# Altium PCB Jacks_old.PcbDoc
Units mil, origin at the board's own origin, x right, y up, seen from the top; angles counter-clockwise.
Board outline 1299.21 x 1653.83 mil, 2 copper layers (Top Layer, Bottom Layer); 3 components, 5 nets, 26 pads, 0 vias.
Unrouted connection lines stored in the file: 1.
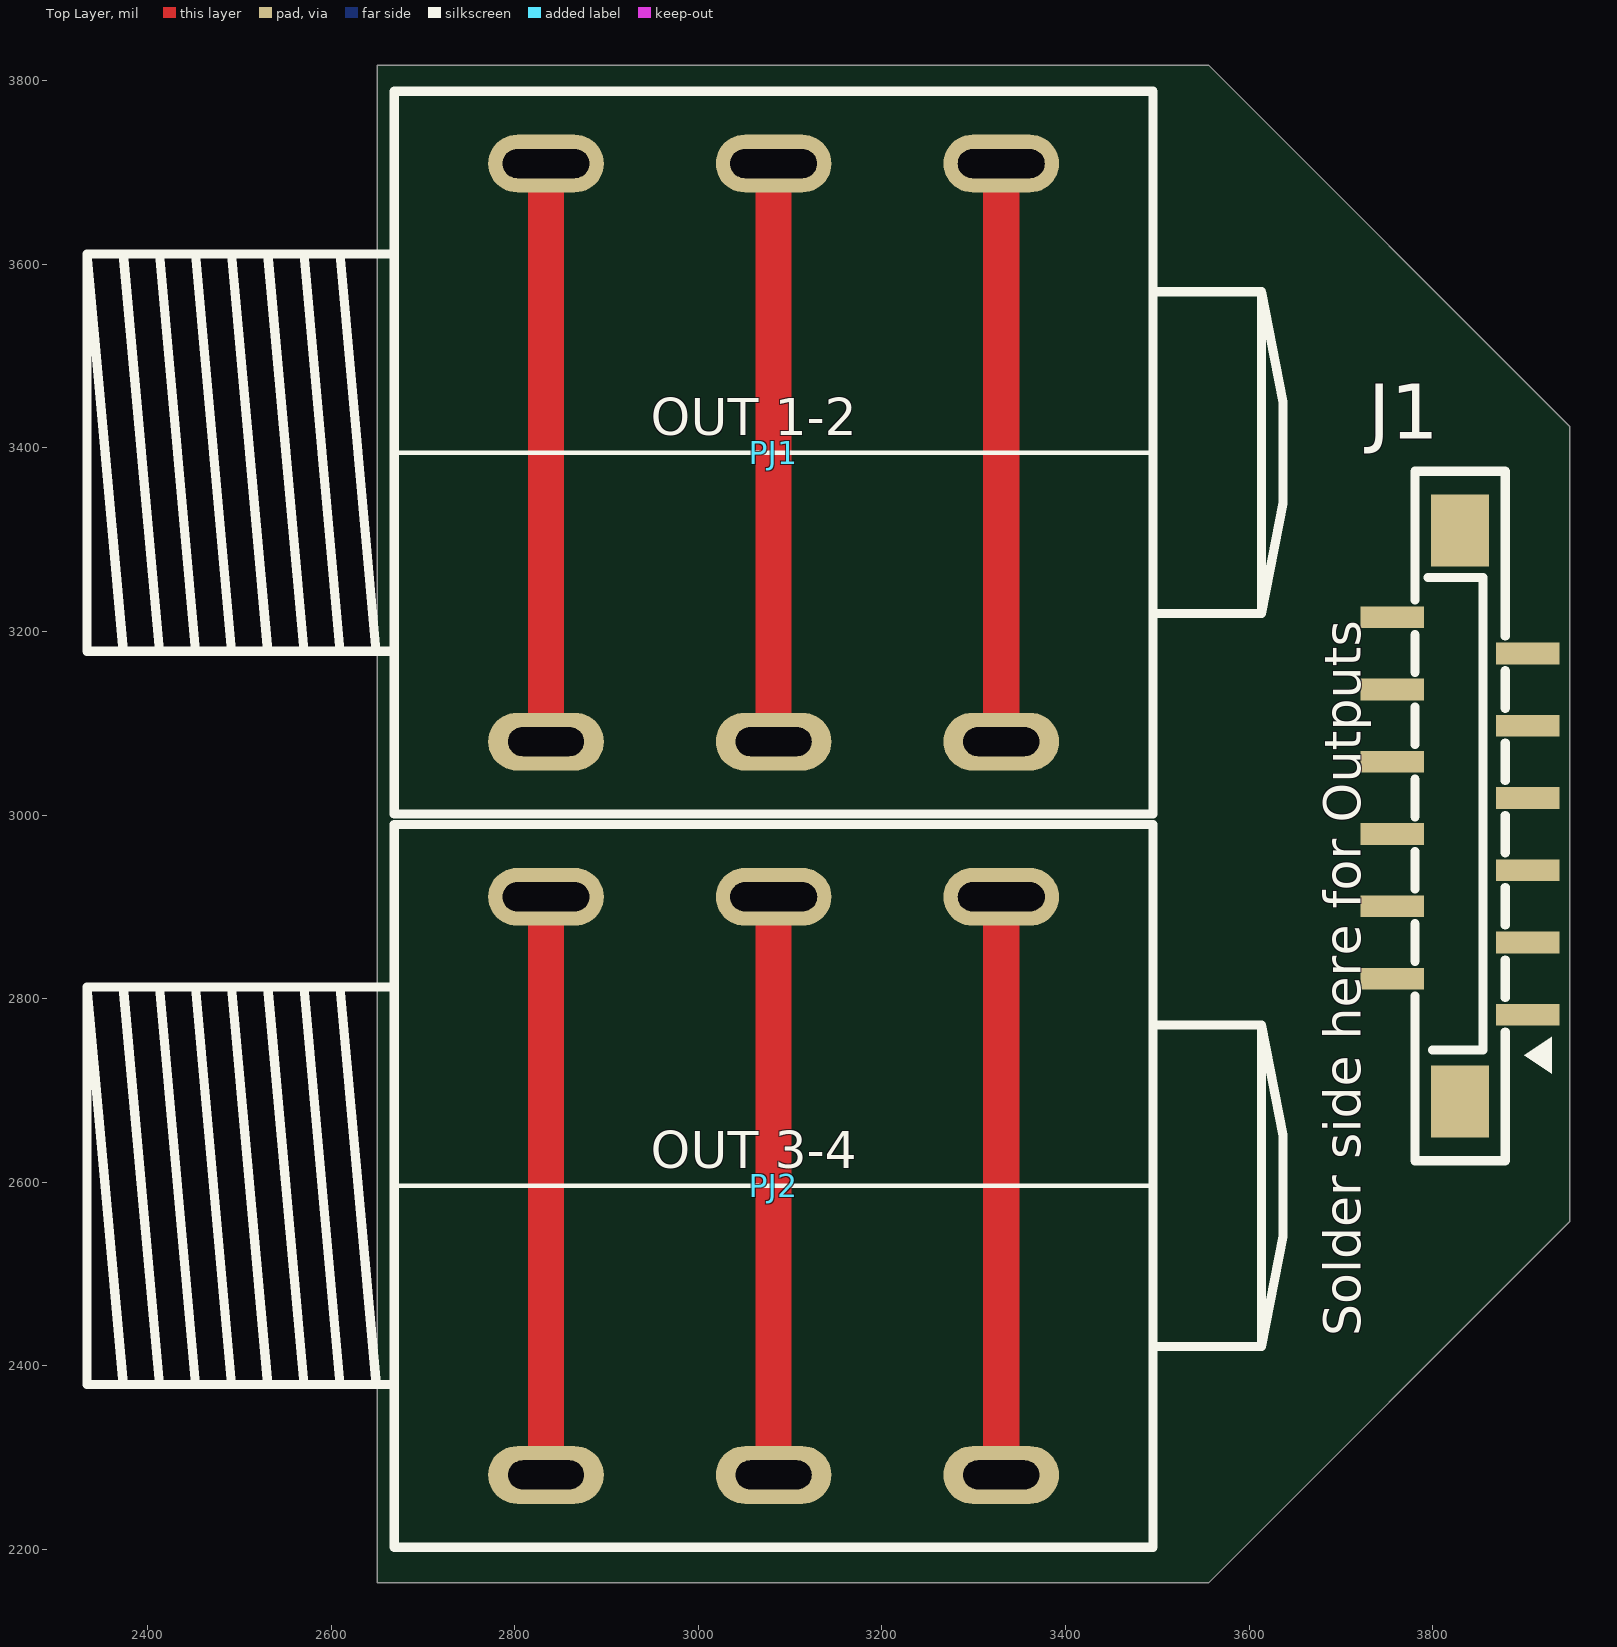
[diagram p0: Top Layer view]
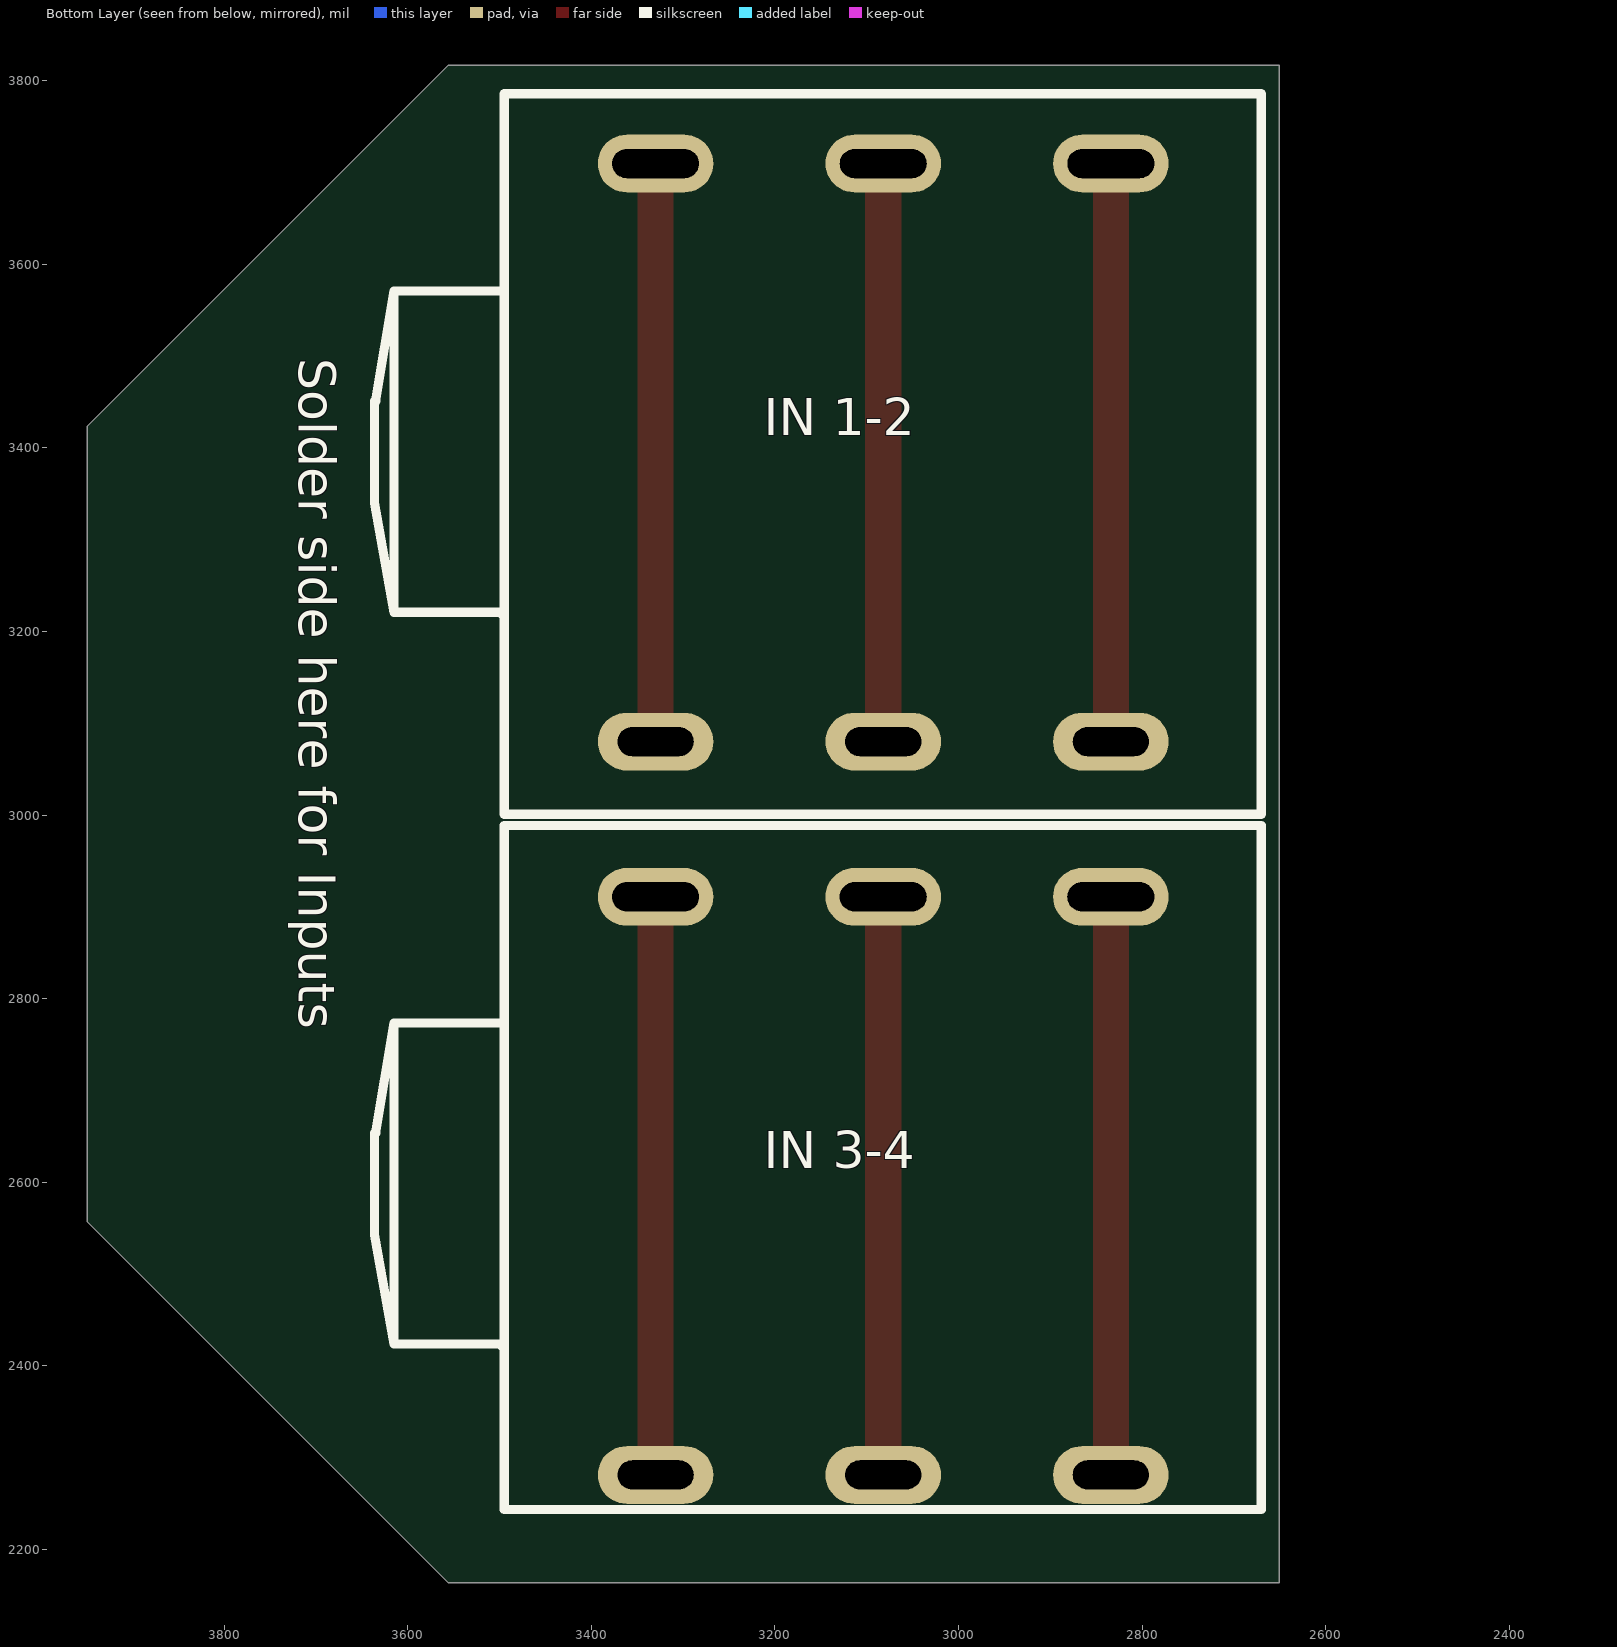
[diagram p1: Bottom Layer view, seen from below]
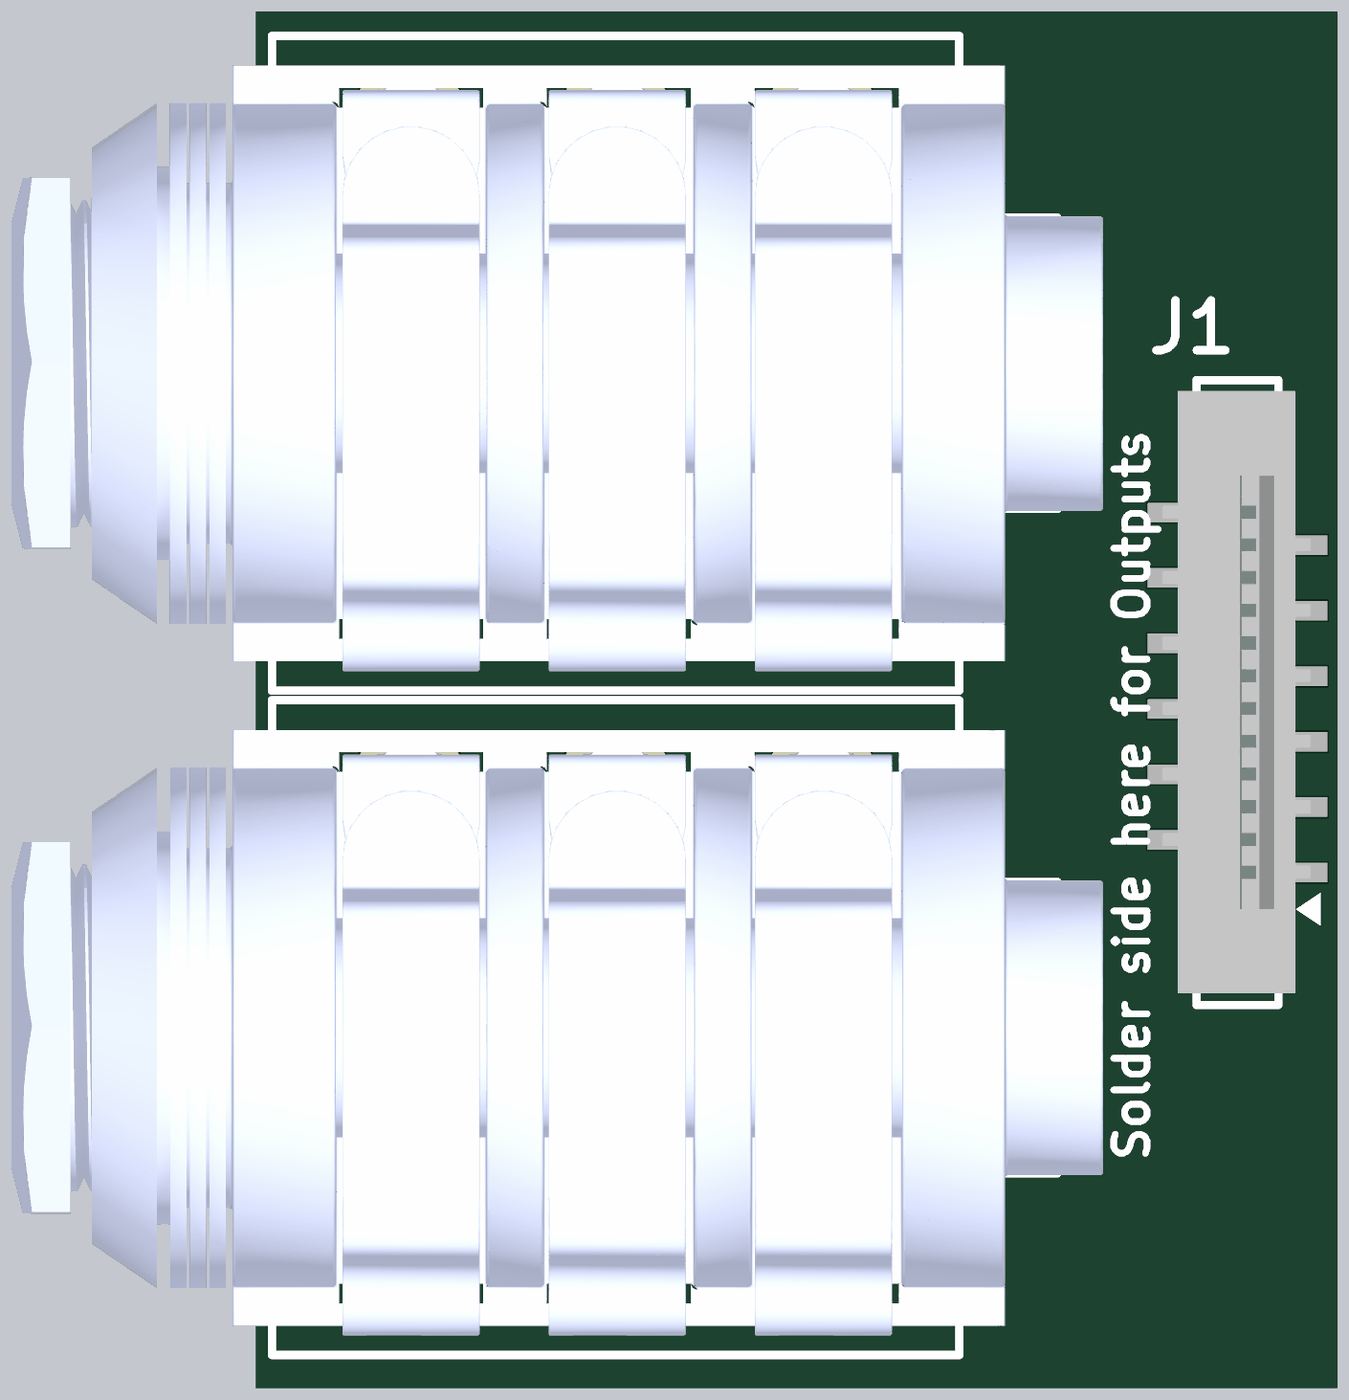
[diagram p2: 3D render of the assembled board from above, using the file's embedded part models]

## Layer stack, top to bottom
Top Solder: solder mask 0.4, Solder Resist, Dk 3.5
Top Layer: signal copper 1.4
Dielectric 1: dielectric 12.6, FR-4, Dk 4.8
Bottom Layer: signal copper 1.4
Bottom Solder: solder mask 0.4, Solder Resist, Dk 3.5

## Board outline
2650.25,2163.36 2650.25,3817.19 3555.76,3817.19 3949.46,3423.49 3949.46,2557.07 3555.76,2163.36

## Design rules (kind name [scope] priority, off if disabled: settings)
Clearance [All] p1: gap=10 ignorepadtopadclearanceinfootprint=FALSE
PolygonConnect [All] p1: connectstyle=Relief reliefconductorwidth=10 reliefentries=4 polygonreliefangle="90 Angle" airgapwidth=10
RoutingVias [All] p1: holewidth=28 width=50 viastyle="Through Hole" minholewidth=28 minwidth=50 maxholewidth=28 maxwidth=50
SolderMaskExpansion [All] p1: expansion=4 istentingtop=FALSE
Width [All] p1: maxlimit=10 minlimit=10 preferedwidth=10
30 further rules are at their usual default settings.

## Components (designator, comment, footprint, x,y, rotation, side; value= is the part's Value field where it differs from the comment)
J1 "0528081271" AFA11-S12GLA-00 3903.82,2782.44 r90 top
PJ1 "PJ-609AE" PJ609AE 2833.94,3080 r0 top
PJ2 "PJ-609AE" PJ609AE 2833.97,2281 r0 top

## Footprints (in the part's own frame and the unit in brackets; to place one, negate y for a bottom-side part, rotate by r counter-clockwise, add the part's x,y. Pads: shape width x height; smd on the part's side, far side on the other; paste and mask are expansions set on the pad)
AFA11-S12GLA-00 [mm]
  rect 0.6x1.75 smd paste+0 mask+0.05: 1(0,0) 2(1,3.75) 3(2,0) 4(3,3.75) 5(4,0) 6(5,3.75) 7(6,0) 8(7,3.75) 9(8,0) 10(9,3.75) 11(10,0) 12(11,3.75)
  rect 2x1.6 smd paste+0 mask+0.05: 13(13.4,1.875) 14(-2.4,1.875)
  silkscreen extent -4.04,-0.66 15.04,3.13, body extent -3.69,-0.35 14.71,4.16, height 5.35
PJ609AE [mm] "HOOYA"
  oval 3.2x1.6 hole 0.8 slot 2.1 at 0 deg paste-2539.97 mask+0.051: 2(0,0) 4(6.3,0) 6(12.6,0)
  oval 3.2x1.6 hole 0.8 slot 2.4 at 0 deg paste-2539.97 mask+0.051: 3(0,16) 5(6.3,16) 7(12.6,16)
  silkscreen extent -12.7,-2 20.4,18, body extent -12.16,-1.4 21.2,17.09, height 16.2

## Part data
J1: "Connector", Manufacturer_Name=Molex, Datasheet Link=https://www.molex.com/pdm_docs/sd/528082071_sd.pdf, Height=5.3mm, Manufacturer_Part_Number=0528081271, System=Connector
PJ1 PJ2: "6.3mm jack HOOYA"

## Nets (pads, with @x,y where several pads share a name; then routed paths per layer and width w, separated by ;. In a path a pad name is that pad's centre, name@x,y a point inside that pad or via, vN(x,y) a via of type N, cw(c..) or ccw(c..) an arc to the next point about the centre after c; other vN are vias at no path point)
GND_A: PJ1.2 PJ1.3 PJ2.2 PJ2.3 | length 1259.8
  Top Layer w39.37: PJ2.2 PJ2.3 ; PJ1.2 PJ1.3
LOUT1: PJ1.6 PJ1.7 | length 629.9
  Top Layer w39.37: PJ1.6 PJ1.7
LOUT2: PJ2.6 PJ2.7 | length 629.9
  Top Layer w39.37: PJ2.6 PJ2.7
ROUT1: PJ1.4 PJ1.5 | length 629.9
  Top Layer w39.37: PJ1.4 PJ1.5
ROUT2: PJ2.4 PJ2.5 | length 629.9
  Top Layer w39.37: PJ2.4 PJ2.5
pads on no net: J1.1 J1.2 J1.3 J1.4 J1.5 J1.6 J1.7 J1.8 J1.9 J1.10 J1.11 J1.12 J1.13 J1.14

## Silkscreen, mask and mechanical layers (free items; w line width, h text height)
Top Overlay:
  text "OUT 1-2" at 2948,3414 h40
  text "OUT 3-4" at 2948.03,2615 h40
  text "Solder side here for Outputs" at 3721.67,2432 h40 r90
Bottom Overlay:
  lines w10: 3495,2418.5 3500,2423.5 3615,2423.5 ; 3495,2773.5 3615,2773.5 ; 3495,3216 3500,3221 3615,3221 ; 3495,3571 3615,3571 ; 3615,2423.5 3615,2773.5 ; 3615,2423.5 3636.21,2542.66 3636.49,2653.63 3635,2653.5 3615,2773.5 ; 3615,3221 3636.21,3340.16 3636.49,3451.13 3635,3451 3615,3571 ; 3615,3221 3615,3571 ; 2670,2243.36 3495,2243.36 3495,2988.5 2670,2988.5 2670,2243.36 ; 2670,3001 2670,3786 3495,3786 3495,3001 2670,3001
  text "Solder side here for Inputs" at 3718.67,3498 h40 r90
  text "IN 1-2" at 3212,3414 h40
  text "IN 3-4" at 3212.03,2615 h40
Board Shape:
  the board outline again, w0.5